# Altium PCB triumvi_v10_config.PcbDoc
Units mil, origin at the board's own origin, x right, y up, seen from the top; angles counter-clockwise.
Board outline 1100 x 1020 mil, 4 copper layers (Top Layer, GND, VCC, Bottom Layer), stack 30.634 mil thick; 18 components, 30 nets, 118 pads, 71 vias.
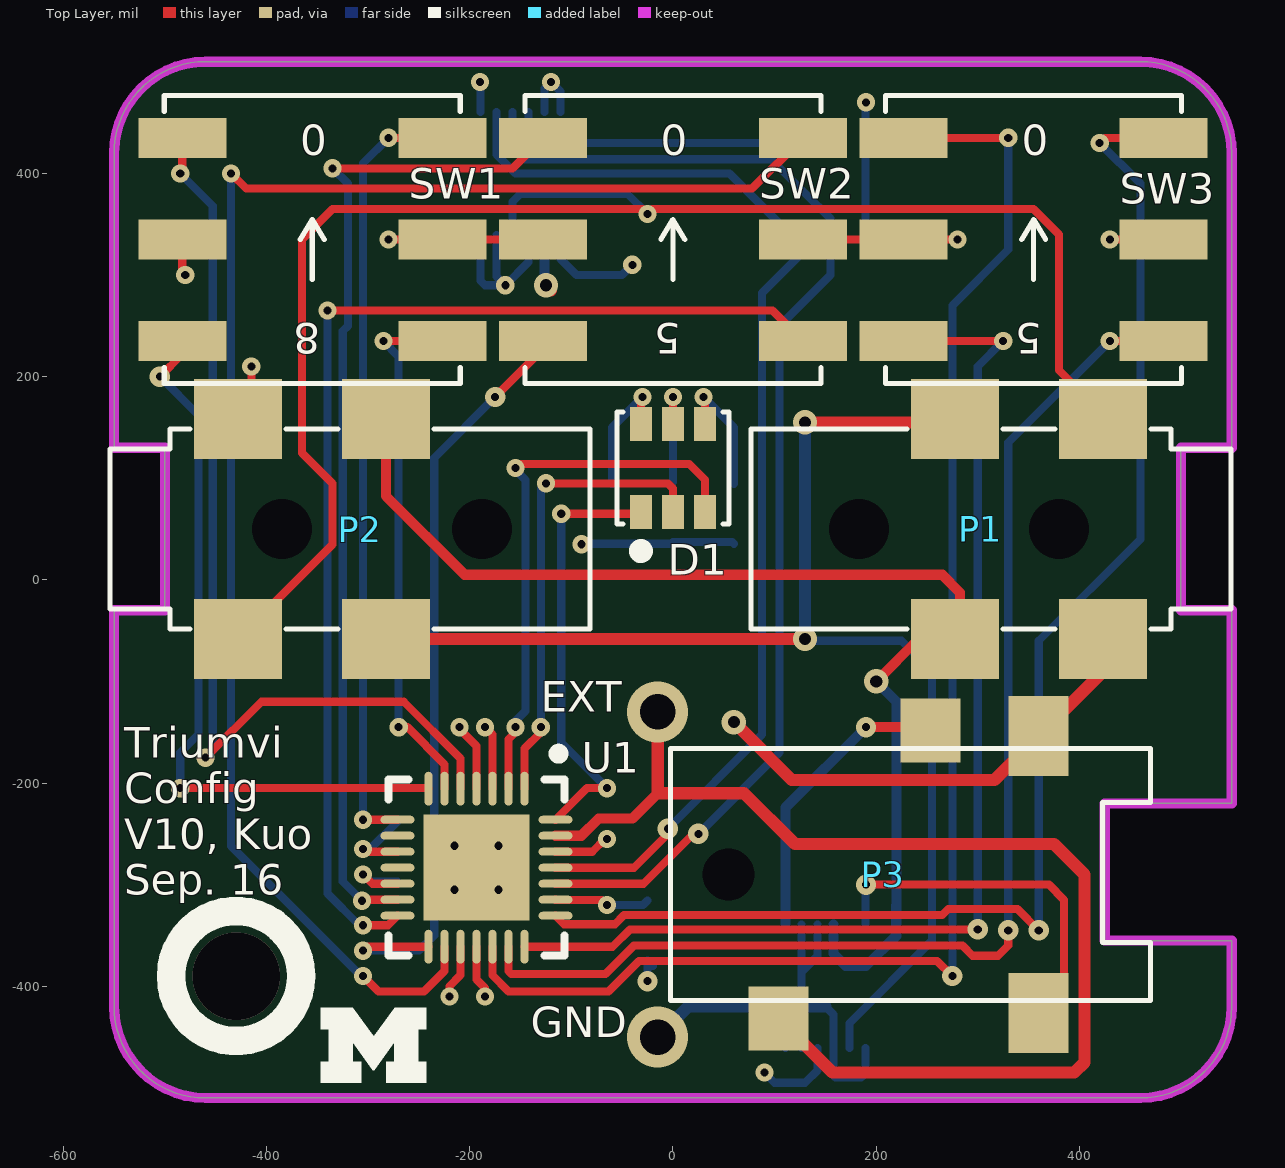
[diagram p0: Top Layer view]
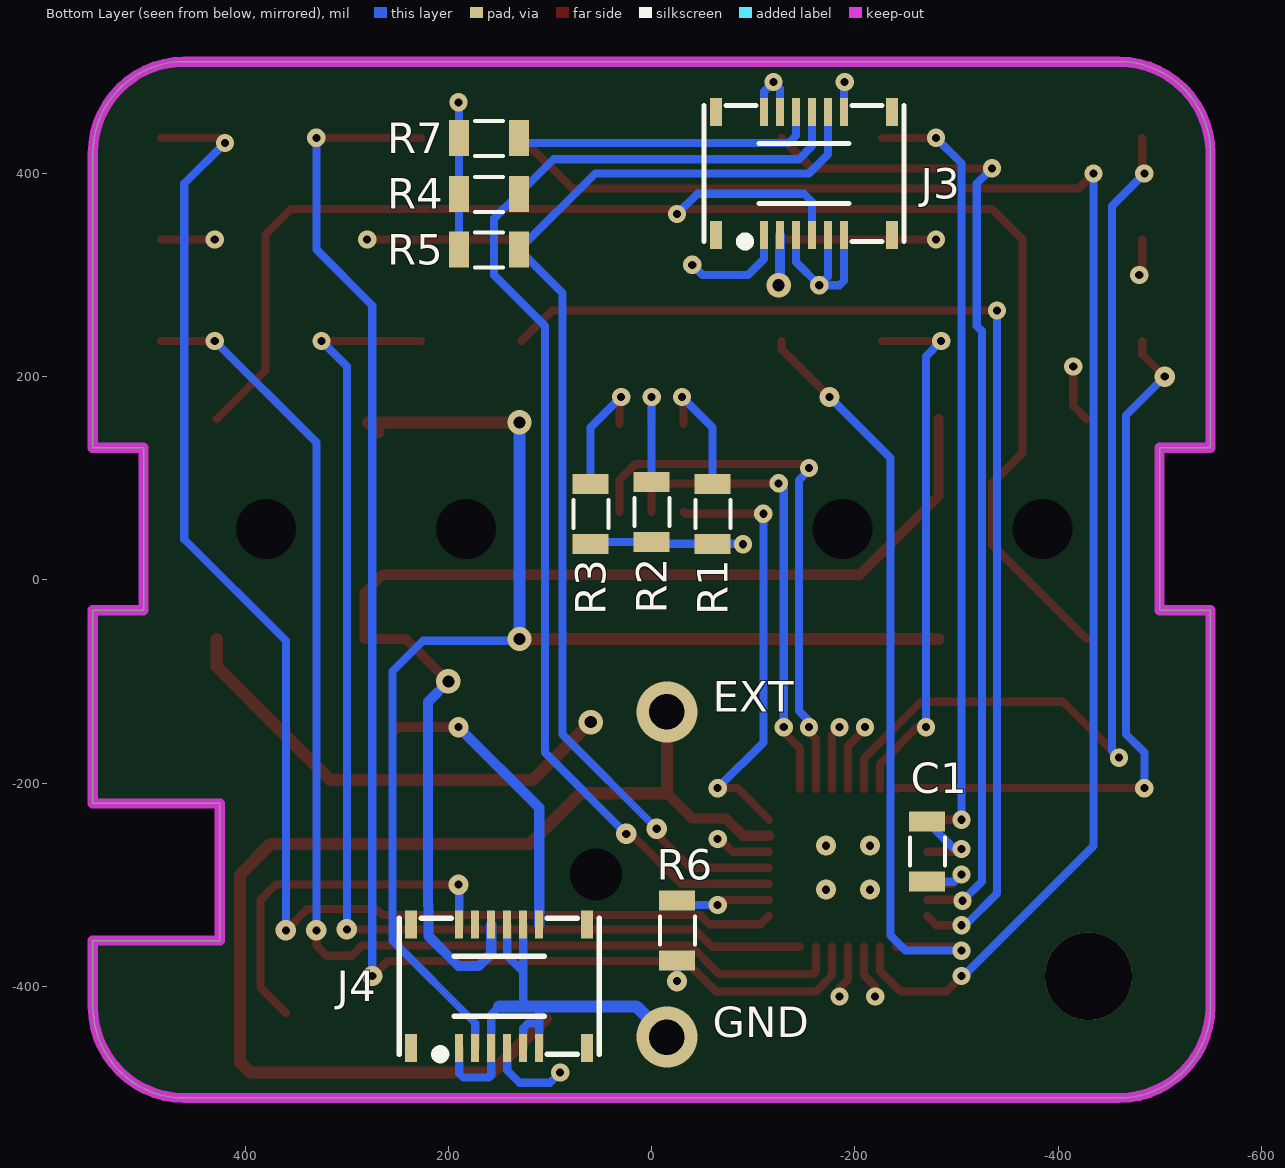
[diagram p1: Bottom Layer view, seen from below]
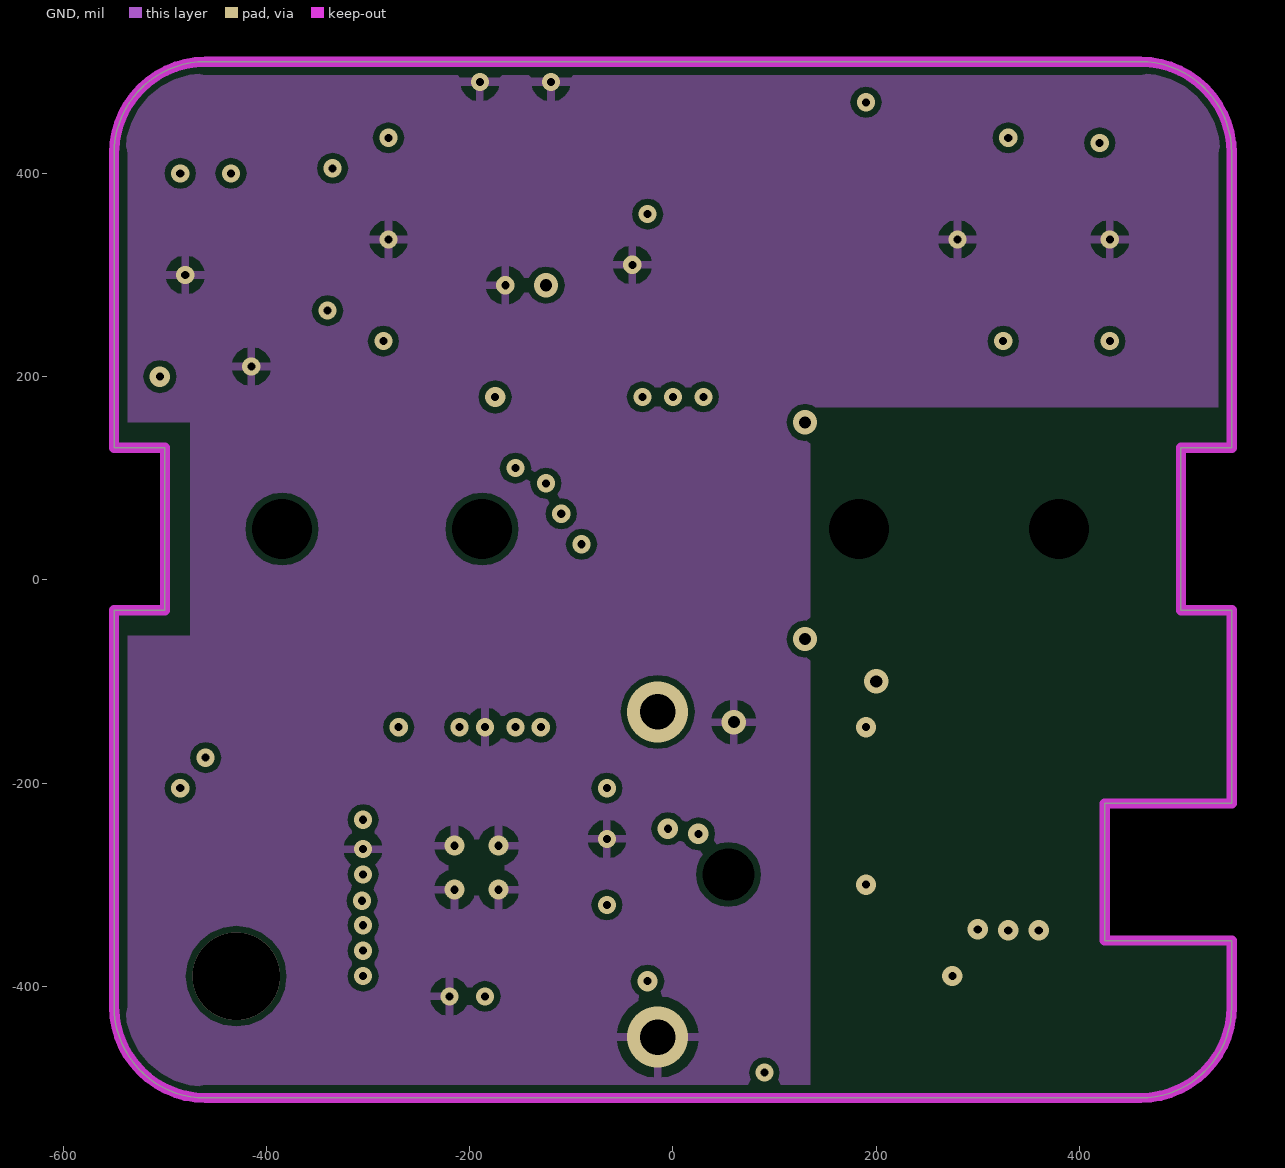
[diagram p2: GND]
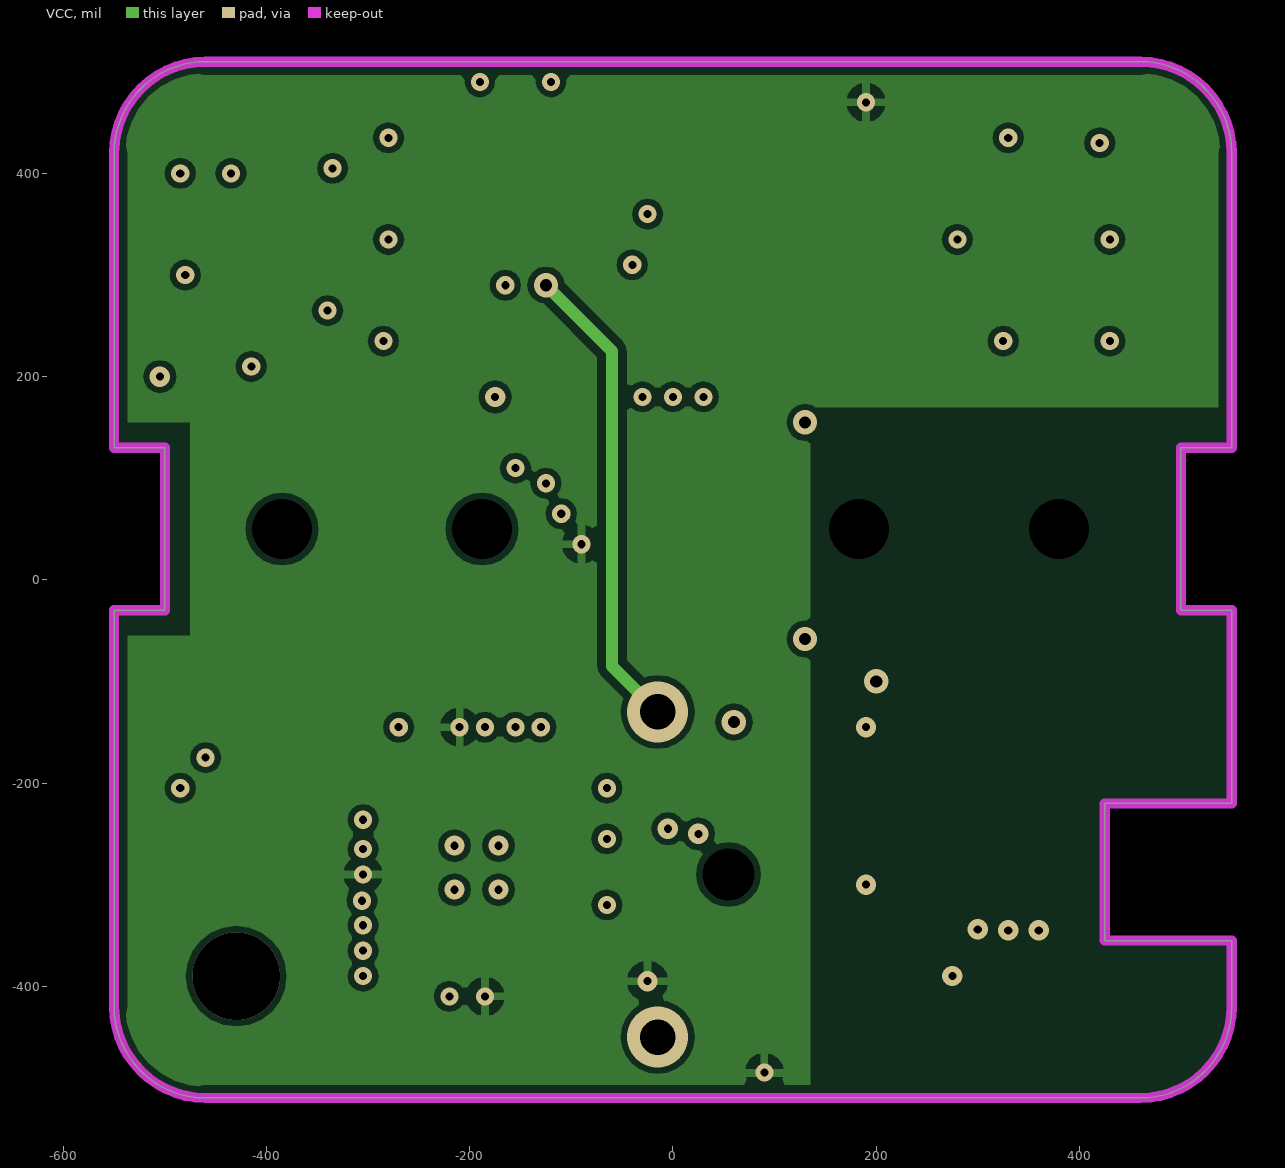
[diagram p3: VCC]
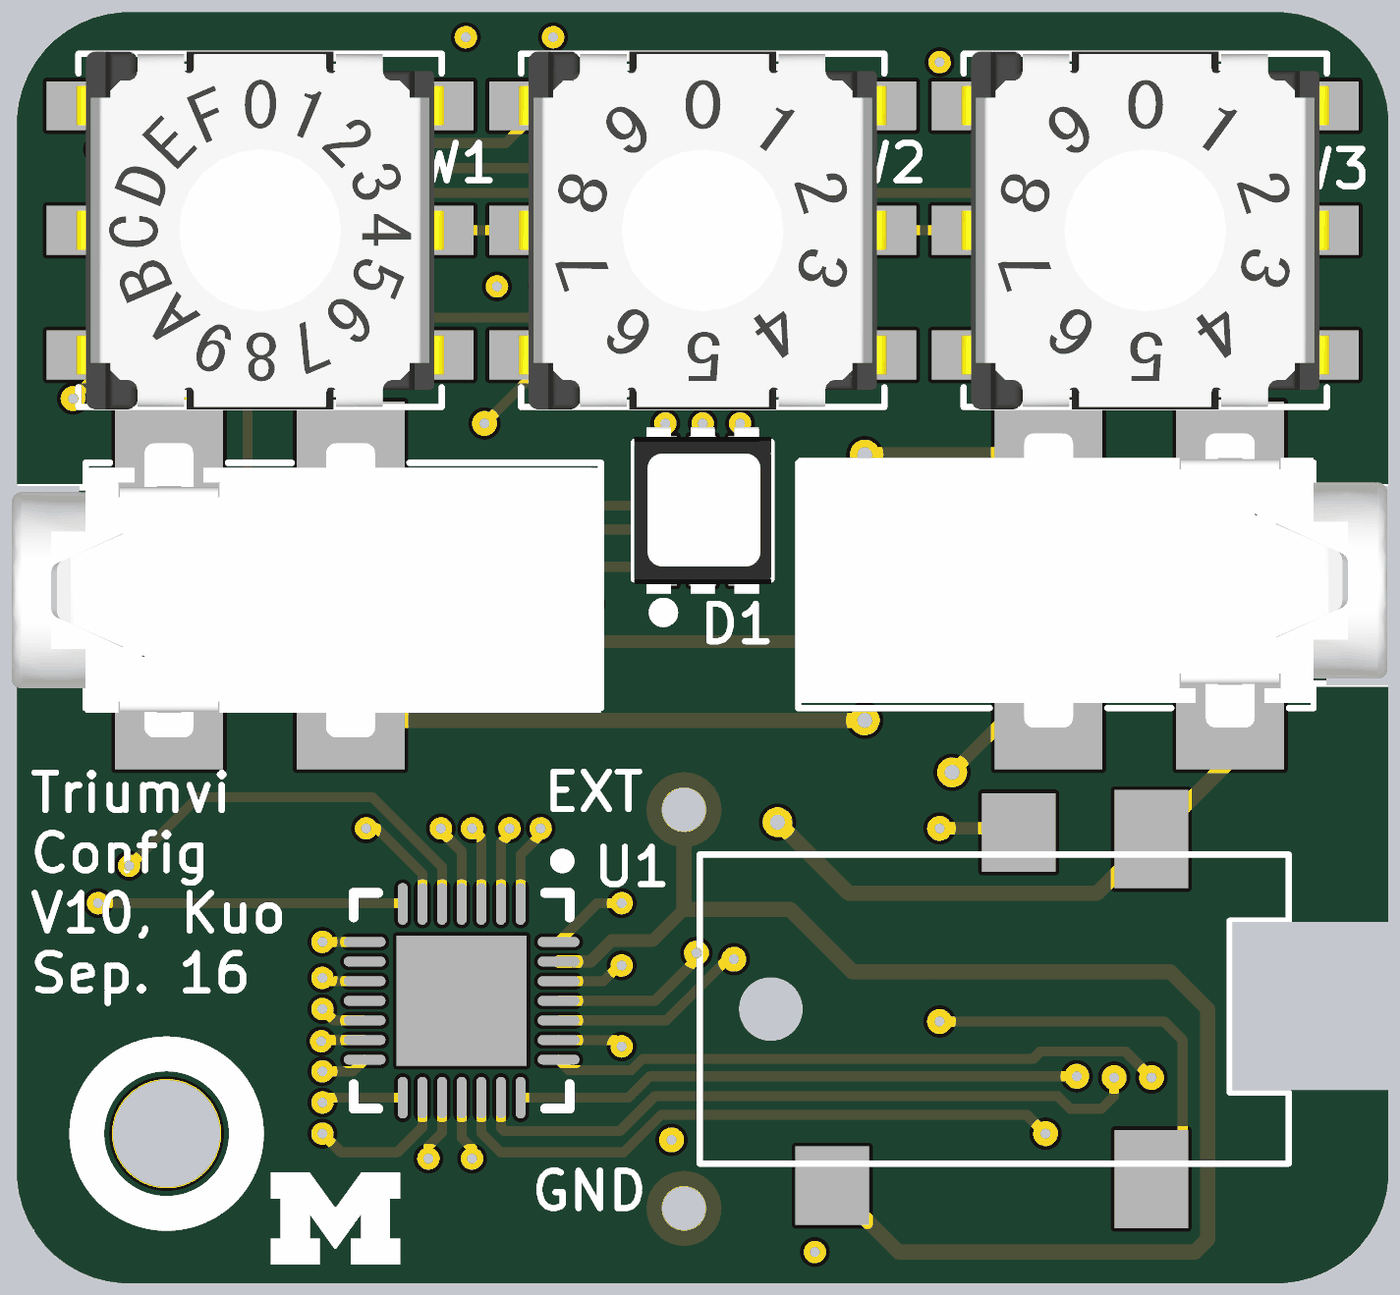
[diagram p4: 3D render of the assembled board from above, using the file's embedded part models]

## Layer stack, top to bottom
Top Solder: solder mask 0.4, Solder Resist, Dk 3.5
Top Layer: signal copper 1.4
Dielectric 1: core 10, FR-4, Dk 4.2
GND: signal copper 1.417
Dielectric 3: prepreg 5, Dk 4.2
VCC: signal copper 1.417
VCC: core 10, Dk 4.2
Bottom Layer: signal copper 1.4
Bottom Solder: solder mask 0.4, Solder Resist, Dk 3.5

## Board outline
-550,-30 -500,-30 -500,130 -550,130 -550,420 cw(c-460,420) -460,510 460,510 cw(c460,420) 550,420 550,130 500,130 500,-30 550,-30 550,-220 425,-220 425,-355 550,-355 550,-420 cw(c460,-420) 460,-510 -460,-510 cw(c-460,-420) -550,-420

## Design rules (kind name [scope] priority, off if disabled: settings)
Clearance "non plated holes" [InPadClass('NPHOLES')] p1: gap=10 // Sunstone Circuits Minimum Clearance Rule (MLB~4&6 Layer Designs)
Clearance "Clearance~Sunstone Circuits" [All] p2: gap=6 except(8: Track-Poly Poly-Poly) // Sunstone Circuits Minimum Clearance Rule (MLB~4&6 Layer Designs)
DiffPairsRouting [All] p1: maxlimit=10 minlimit=10 mostfreqgap=10 toplayer_minwidth=6 toplayer_maxwidth=15 toplayer_prefwidth=15 midlayer1_minwidth=6 midlayer1_maxwidth=15 midlayer1_prefwidth=15 midlayer2_minwidth=6 midlayer2_maxwidth=15 midlayer2_prefwidth=15 bottomlayer_minwidth=6 bottomlayer_maxwidth=15 bottomlayer_prefwidth=15 maxuncoupledlength=500
HoleSize "HoleSize~Sunstone Circuits" [All] p1: absolutevalues=TRUE maxlimit=251 minlimit=8 maxpercent=80.000 minpercent=20.000 // Sunstone Circuits Hole Size Rule (MLB~4&6 Layer Designs)
HoleSize Testpoint [All] p2: absolutevalues=TRUE maxlimit=100 minlimit=1 maxpercent=80.000 minpercent=20.000
HoleSize TestPointUsage [All] p3: absolutevalues=TRUE maxlimit=100 minlimit=1 maxpercent=80.000 minpercent=20.000
MinimumAnnularRing "MinimumAnnularRing~Sunstone Circuits" [All] p1 off: minimumring=7 // Sunstone Circuits Minimum Annular Ring (MLB~4&6 Layer Designs)
MinimumSolderMaskSliver [All] p1 off: minsoldermaskwidth=10
PlaneClearance "PlaneClearance~Sunstone Circuits" [All] p1: clearance=12 // Sunstone Circuits Power Plane Clearance Rule (MLB~4&6 Layer Designs)
PlaneConnect "PlaneConnect~Sunstone Circuits" [All] p1: planeconnectstyle=Relief reliefexpansion=10 reliefentries=4 reliefconductorwidth=8 reliefairgap=10 // Sunstone Circuits Power Plane Connect Rule (MLB~4&6 Layer Designs)
PolygonConnect "PolygonConnect~Sunstone Circuits" [All] p1: connectstyle=Relief reliefconductorwidth=8 reliefentries=4 polygonreliefangle="90 Angle" airgapwidth=10 // Sunstone Circuits Polygon Connect Style (MLB~4&6 Layer Designs)
RoomDefinition config_battery [InComponentClass('config_battery')] p1 off: confinementstyle=ConfineIn formatcopy=TRUE lockcomponents=FALSE outline -539.26,175.77 -539.26,484.23 -260.93,484.23 -260.93,487.41 -39.07,487.41 -39.07,484.23 539.26,484.23 539.26,20.52 544.22,20.52 544.22,-524.67 45.78,-524.67 45.78,-516.59 -450.91,-516.59 -450.91,23.74 -494.61,23.74 -494.61,175.77
RoutingVias "RoutingVias~Sunstone Circuits" [All] p1: holewidth=16 width=30 viastyle="Through Hole" minholewidth=6 minwidth=18 maxholewidth=20 maxwidth=40 // Sunstone Circuits Routing Vias Rule (MLB~4&6 Layer Designs)
ShortCircuit "ShortCircuit~Sunstone Circuits" [All] p1: allowed=FALSE // Sunstone Circuits Short Circuit Rule~Do Not Allow (MLB~4&6 Layer Designs)
SilkToSilkClearance [All] p1 off: silktosilkclearance=10
SilkToSolderMaskClearance [IsPad] p1 off: minsilkscreentomaskgap=10 clearancetoexposedcopper=TRUE
SolderMaskExpansion TentVias [isVia] p1: expansion=-20 // Sunstone Circuits Solder Mask Expansion Rule (MLB~4&6 Layer Designs)
SolderMaskExpansion "SolderMaskExpansion~Sunstone Circuits" [All] p2: expansion=3 // Sunstone Circuits Solder Mask Expansion Rule (MLB~4&6 Layer Designs)
ViasUnderSMD "ViasUnderSMD~Sunstone Circuits" [All] p1: allowed=FALSE // Sunstone Circuits Vias Under SMD~Do Not Allow (MLB~4&6 Layer Designs)
Width "Width~Sunstone Circuits" [All] p1: maxlimit=100 minlimit=6 preferedwidth=10 // Sunstone Circuits Minimum Width Rule (MLB~4&6 Layer Designs)
22 further rules are at their usual default settings.

## Components (designator, comment, footprint, x,y, rotation, side; value= is the part's Value field where it differs from the comment)
C1 "Ceramic capacitor" 0603 -271.1,-267.6 r90 bottom
D1 "CLY6D-FKC" PLCC6 0,110 r90 top
J3 "DF40B(2.0)-12DS-0.4V" DF40B(2.0)-12DS-0.4V -150,400 r180 bottom locked
J4 "DF40B(2.0)-12DS-0.4V" DF40B(2.0)-12DS-0.4V 150,-400 r180 bottom locked
P1 "PJ2505S-041" PJ2505S-041 490,50 r180 top
P2 "PJ2505S-041" PJ2505S-041 -495,50 r0 top
P3 "PJ3516S-041" PJ3516S-041 470,-290 r180 top
R1 "Chip resistor" 0603 -60,65 r90 bottom
R2 "Chip resistor" 0603 0,66.69 r90 bottom
R3 "Chip resistor" 0603 60,65 r90 bottom
R4 "Chip resistor" 0603 160,380 r180 bottom
R5 "Chip resistor" 0603 160,325 r180 bottom
R6 "Chip resistor" 0603 -25,-345 r90 bottom
R7 "Chip resistor" 0603 160,435 r180 bottom
SW1 "SH-7050TA" SH-7050A -355,335 r0 top
SW2 "SH-7010TA" SH-7010A 0,335 r0 top
SW3 "SH-7010TA" SH-7010A 355,335 r0 top
U1 "SX1509B" QFN40P400X400X60_HS-29N -193.35,-283.35 r270 top

## Footprints (in the part's own frame and the unit in brackets; to place one, negate y for a bottom-side part, rotate by r counter-clockwise, add the part's x,y. Pads: shape width x height; smd on the part's side, far side on the other; paste and mask are expansions set on the pad)
0603 [mm] "2-Leads, Body 1.55x0.85mm, IPC Medium Density"
  rect 0.5x0.9 smd: 1(-0.75,0) 2(0.75,0)
  silkscreen extent -0.35,-0.45 0.35,0.43, body extent -0.75,-0.42 0.75,0.43, height 0.5
DF40B(2.0)-12DS-0.4V [mm] "Hirose DF40 Series, 0.4 mm pitch, 2.0 mm stack height, 12 positions"
  rect 0.2x0.7 smd: 1(-1,-1.54) 2(-0.6,-1.54) 3(-0.2,-1.54) 4(0.2,-1.54) 5(0.6,-1.54) 6(1,-1.54) 7(1,1.54) 8(0.6,1.54) 9(0.2,1.54) 10(-0.2,1.54) 11(-0.6,1.54) 12(-1,1.54)
  rect 0.3x0.7 smd: ""(-2.2,-1.54) ""(-2.2,1.54) ""(2.2,-1.54) ""(2.2,1.54)
  silkscreen extent -2.5,-1.8 2.5,1.7, body extent -2.5,-1.69 2.5,1.69, height 1.9
PJ2505S-041 [mm] "2.5 mm phone jack, 4 terminals"
  rect 2.2x2 smd: 1(1.7,2.75) 2(1.7,-2.75) 3(5.4,2.75) 4(5.4,-2.75)
  round 0 hole 1.5 unplated: ""(2.8,0) ""(7.8,0)
  silkscreen extent -1.5,-2.5 10.5,2.5, body extent -1.5,-3.1 10.5,2.9, height 3.7
PJ3516S-041 [mm] "Switchtech Enterprise LTD. 3.5mm phone jack"
  rect 1.5x2 smd: 1(2.8,-3.465) 2(2.8,3.465)
  rect 1.5x1.6 smd: 3(5.5,-3.6) 4(9.3,3.6)
  rect 0x0 hole 1.3 unplated: ""(10.55,0)
  silkscreen extent 0,-3.15 12,3.15, body extent -2,-3.15 12,3.15, height 4.5
PLCC6 [mm] "CREE PLCC6 LED"
  rect 0.85x0.55 smd: 1(-1.1,0.8) 2(-1.1,0) 3(-1.1,-0.8) 4(1.1,-0.8) 5(1.1,0) 6(1.1,0.8)
  silkscreen extent -2.22,-1.4 1.4,1.4, body extent -1.7,-1.4 1.7,1.4, height 1.85
QFN40P400X400X60_HS-29N [mm] "QFN, 28-Leads, Body 4.00x4.00mm, Pitch 0.40mm, Thermal Pad 2.65x2.65mm, IPC Medium Density"
  oval 0.85x0.2 smd: 1(-1.975,1.2) 2(-1.975,0.8) 3(-1.975,0.4) 4(-1.975,0) 5(-1.975,-0.4) 6(-1.975,-0.8) 7(-1.975,-1.2) 15(1.975,-1.2) 16(1.975,-0.8) 17(1.975,-0.4) 18(1.975,0) 19(1.975,0.4) 20(1.975,0.8) 21(1.975,1.2)
  oval 0.2x0.85 smd: 8(-1.2,-1.975) 9(-0.8,-1.975) 10(-0.4,-1.975) 11(0,-1.975) 12(0.4,-1.975) 13(0.8,-1.975) 14(1.2,-1.975) 22(1.2,1.975) 23(0.8,1.975) 24(0.4,1.975) 25(0,1.975) 26(-0.4,1.975) 27(-0.8,1.975) 28(-1.2,1.975)
  rect 2.65x2.65 smd: 29(0,0)
  silkscreen extent -2.97,-2.2 2.2,2.2, body extent -2.05,-2.05 2.05,2.05, height 0.6
SH-7010A [mm] "Rotary Coded Switch, SH-7000 series, 10 positions, real code, J hook"
  rect 2.2x1 smd: 1(-3.25,2.54) 2(3.25,-2.54) 4(-3.25,-2.54) 8(3.25,2.54) C(-3.25,0) C(3.25,0)
  silkscreen extent -3.7,-3.6 3.7,3.6, body extent -3.75,-3.65 3.75,3.65, height 3.77
SH-7050A [mm] "Rotary Coded Switch, SH-7000 series, 16 positions, real code, J hook"
  rect 2.2x1 smd: 1(-3.25,2.54) 2(3.25,-2.54) 4(-3.25,-2.54) 8(3.25,2.54) C(-3.25,0) C(3.25,0)
  silkscreen extent -3.7,-3.6 3.7,3.6, body extent -3.75,-3.65 3.75,3.65, height 3.77

## Part data
C1: library part C_0.1u_25V_0603_ceramic, "Ceramic capacitor, 0.1 uF, 0603 package"
D1: library part D_CLY6D-FKC, "CREE PLCC6 3 in 1 SMD LED"
J3 J4: "Hirose BM20 Series, 0.4mm pitch, 2mm stack height, 12 pos, header"
P1 P2: "2.5 mm phone jack, 4 terminals"
P3: "3.5 mm phone jack, 4 terminals"
R1: library part R_150_0603, "Chip resistor, 150,  0603 package"
R2: library part R_220_0603, "Chip resistor, 220, 0603 package"
R3: library part R_330_0603, "Chip resistor, 330, 0603 package"
R4 R5: library part R_20K_0603, "Chip resistor, 20K, 0603 package"
R6 R7: library part R_100K_0603, "Chip resistor, 100K, 0603 package"
SW1 SW2 SW3: "ROTARY CODED SWITCHES"
U1: "Voltage Level Shifting GPIO  with LED Driver and Keypad Engine"

## Via types
v1: diameter 18, hole 8, Top Layer to Bottom Layer, 48 vias
v2: diameter 20, hole 8, Top Layer to Bottom Layer, 11 vias
v3: diameter 24, hole 12, Top Layer to Bottom Layer, 5 vias
v4: diameter 19.68, hole 8, Top Layer to Bottom Layer, 4 vias
v5: diameter 60, hole 35, Top Layer to Bottom Layer, 2 vias
v6: diameter 86, hole 86, Top Layer to Bottom Layer, 1 vias

## Nets (pads, with @x,y where several pads share a name; then routed paths per layer and width w, separated by ;. In a path a pad name is that pad's centre, name@x,y a point inside that pad or via, vN(x,y) a via of type N, cw(c..) or ccw(c..) an arc to the next point about the centre after c; other vN are vias at no path point)
BATT_PACK_PWR: C1.1 J4.4 R1.1 R2.1 R3.1 R4.1 R5.1 R6.1 R7.1 U1.4 U1.12 U1.18 | length 603.6
  Top Layer w8: v1@-305.47,-289.53 v1(-305,-290) -295.91,-299.09 U1.12 ; v1(-210,-145) -210,-146.87 -193.35,-163.52 U1.4 ; U1.18 -193.35,-393.22 -185,-401.57 v1(-185,-410)
  Bottom Layer w8: v1(-305,-290) -297.87,-297.13 C1.1 ; v1(-90,35) -89.53,35.47 R1.1 -1.69,35.47 R2.1 58.31,37.17 R3.1 ; v2(-25,-395) R6.1 R6.1@-19.53,-380 ; v1(90,-485) 100,-495 130,-495 142.13,-482.87 J4.4 ; R5.1 R4.1 R7.1 189.53,469.53 v1(190,470)
EXT_VOLT_SEL: J4.12 P3.2 | length 362.7
  Top Layer w8: v2(190,-300) 370,-300 385,-315 385,-401.18 P3.2
  Bottom Layer w8: J4.12 189.37,-300.63 v2(190,-300)
EXT_VOLT_WAVE: J4.7 P3.3 | length 292.1
  Top Layer w10: v2(190,-145) 250.2,-145 P3.3
  Bottom Layer w10: J4.7 110.63,-224.37 v2(190,-145)
GND: C1.2 J3.1 J3.3 J3.5 J3.6 J3.7 J3.11 J3.12 J4.1 J4.3 J4.5 J4.6 J4.8 J4.9 P1.1 P2.1 P3.1 SW1.C SW2.C SW3.C U1.3 U1.10 U1.17 U1.26 U1.29 | length 2077.4
  Top Layer w8: SW1.C@-482.95,335 -482.95,302.95 v1(-480,300) ; P2.1 -415,171.34 v1(-415,210) ; v1(-305,-265) -302.4,-267.6 U1.10 ; v1(-280,335) -227.05,335 SW2.C@-127.95,335 ; v1(-220,-410) -220,-400 -209.09,-389.09 U1.17 ; v1(-185,-145) -177.6,-152.4 U1.3 ; U1.26 -79.47,-267.6 -66.87,-255 v1(-65,-255) ; SW2.C@127.95,335 227.05,335 v1(280,335) ; v1(430,335) SW3.C@482.95,335
  Top Layer w12: v3(60,-140) 117,-197 316.35,-197 P3.1 428.07,-85.28 P1.1@428.07,-58.27
  Bottom Layer w8: v1(-305,-265) -298.03,-265 C1.2 ; v1(-190,490) -189.37,489.37 J3.7 ; J3.6 -189.37,294.37 -185,290 v1(-165,290) ; J3.5 -173.62,298.62 v1(-165,290) ; J3.3 -142.13,312.87 v1(-165,290) ; J3.11 -126.38,483.62 v1(-120,490) -110.63,480.63 J3.12 ; J3.1 -110.63,315.63 -95,300 -50,300 v1(-40,310) v1@-40,305 ; 105,-420 110.63,-425.63 110.63,-436.85 ; J4.6 110.63,-436.85 ; J4.5 126.38,-441.38 121.85,-436.85 110.63,-436.85 ; 126.38,-420 126.38,-385.85 ; J4.8 126.38,-385.85 ; J4.9 142.13,-370.1 126.38,-385.85 ; 150,-420 157.87,-427.87 J4.3 157.87,-487.87 160,-490 185,-490 189.37,-485.63 J4.1
  Bottom Layer w12: v5(-15,-450) 15,-420 105,-420 126.38,-420 150,-420
  other v4: -215,-305 -171.69,-305 -215,-261.69 -171.69,-261.69
I2C_SCL: J3.8 R5.2 U1.25 | length 1147.5
  Top Layer w8: U1.25 -38.35,-283.35 0,-245 v2(-5,-245)
  Bottom Layer w8: J3.8 -173.62,418.62 -155,400 55.47,400 R5.2 87.72,282.24 87.72,-152.28 v2(-5,-245)
I2C_SDA: J3.9 R4.2 U1.24 | length 1196.5
  Top Layer w8: U1.24 -29.09,-299.09 20,-250 v2(25,-250)
  Bottom Layer w8: J3.9 -157.87,426.87 -145,414 96.47,414 R4.2 155,355.47 155,300 105,250 105,-170 v2(25,-250)
NetD1_1: D1.1 U1.28 | length 431.3
  Top Layer w8: U1.28 -84.49,-205 v1(-65,-205) ; v1(-110,65) -33.19,65 D1.1
  Bottom Layer w8: v1(-110,65) -110,-160 v1(-65,-205)
NetD1_2: D1.2 U1.1 | length 459.7
  Top Layer w8: U1.1 -146.1,-166.1 -130,-150 v1(-130,-145) ; v1(-125,95) -5,95 0,90 D1.2
  Bottom Layer w8: v1(-130,-145) -130,90 v1(-125,95)
NetD1_3: D1.3 U1.2 | length 553.1
  Top Layer w8: U1.2 -161.85,-156.85 -155,-150 v1(-155,-145) ; v1(-155,110) -151,114 16,114 31.5,98.5 D1.3
  Bottom Layer w8: v1(-155,-145) -155,-139.13 -145,-129.13 -145,98.13 -155,108.13 v1(-155,110)
NetD1_4: D1.4 R3.2 | length 125.2
  Top Layer w8: v1(30,180) 31.5,178.5 D1.4
  Bottom Layer w8: v1(30,180) 60,150 R3.2
NetD1_5: D1.5 R2.2 | length 110.5
  Top Layer w8: D1.5 v1(0,180)
  Bottom Layer w8: R2.2 v1(0,180)
NetD1_6: D1.6 R1.2 | length 125.2
  Top Layer w8: D1.6 -31.5,178.5 v1(-30,180)
  Bottom Layer w8: R1.2 -60,150 v1(-30,180)
NetJ3_10: J3.10 R7.2 | length 301.1
  Bottom Layer w8: J3.10 -142.13,437.13 -135,430 125.47,430 R7.2
NetR6_2: R6.2 U1.23 | length 94.6
  Top Layer w8: U1.23 -115.43,-315 -70,-315 v1(-65,-320)
  Bottom Layer w8: v1(-65,-320) -29.53,-320 R6.2
NetSW1_1: SW1.1 U1.5 | length 953.5
  Top Layer w8: v1(-485,400) -482.95,402.05 SW1.1 ; v1(-460,-175) -405,-120 -265,-120 -209.09,-175.91 U1.5
  Bottom Layer w8: v1(-485,400) -453,368 -453,-168 v1(-460,-175)
NetSW1_2: SW1.2 U1.6 | length 528.5
  Top Layer w8: v1(-285,235) SW1.2 ; v1(-270,-145) -261.41,-145 -224.84,-181.57 U1.6
  Bottom Layer w8: v1(-285,235) -270,220 v1(-270,-145)
NetSW1_4: SW1.4 U1.7 | length 717
  Top Layer w8: v2(-505,200) -482.95,222.05 SW1.4 ; v1(-485,-205) -241.18,-205 U1.7
  Bottom Layer w8: v2(-505,200) -467,162 -467,-152 -485,-170 v1(-485,-205)
NetSW1_8: SW1.8 U1.8 | length 768.3
  Top Layer w8: v1(-305,-236.1) U1.8 ; v1(-280,435) SW1.8
  Bottom Layer w8: v1(-305,-236.1) -305,410 v1(-280,435)
NetSW2_1: SW2.1 U1.13 | length 991.8
  Top Layer w8: v1(-335,405) -157.95,405 SW2.1 ; v1(-306.01,-315.86) -305,-314.84 U1.13
  Bottom Layer w8: v1(-335,405) -320,390 -320,250 -325,245 -325,-296.87 v1(-306.01,-315.86)
NetSW2_2: SW2.2 U1.14 | length 1139.9
  Top Layer w8: v1(-340,265) 97.95,265 SW2.2 ; v1(-305,-340) -280.51,-340 U1.14
  Bottom Layer w8: v1(-340,265) -340,-308.74 -308.74,-340 v1(-305,-340)
NetSW2_4: SW2.4 U1.15 | length 776.6
  Top Layer w8: v1(-305,-365) -301.1,-361.1 U1.15 ; v2(-175,180) -127.95,227.05 SW2.4
  Bottom Layer w8: v1@-310,-365 v1(-305,-365) -250,-365 -235,-350 -235,120 v2(-175,180)
NetSW2_8: SW2.8 U1.16 | length 1553.3
  Top Layer w8: v1(-435,400) -420,385 77.95,385 SW2.8 ; v1(-305,-390) -290,-405 -245,-405 -224.84,-384.84 U1.16
  Bottom Layer w8: v1(-435,400) -435,-261.87 -306.87,-390 v1(-305,-390)
NetSW3_1: SW3.1 U1.19 | length 1456.6
  Top Layer w8: U1.19 -177.6,-389.17 -161.77,-405 -63.28,-405 -33.28,-375 260,-375 v2(275,-390) ; SW3.1 v1(330,435)
  Bottom Layer w8: v2(275,-390) 275,270 330,325 v1(330,435)
NetSW3_2: SW3.2 U1.20 | length 1226.2
  Top Layer w8: U1.20 -161.85,-385.12 -159.14,-387.83 -66.37,-387.83 -38.53,-360 285,-360 295,-370 320,-370 330,-360 v2(330,-345) ; v1(430,235) SW3.2
  Bottom Layer w8: v2(330,-345) 330,135 v1(430,235)
NetSW3_4: SW3.4 U1.21 | length 1140.5
  Top Layer w8: U1.21 -59.43,-361.1 -42.33,-344 v2(300,-344) ; SW3.4 v1(325,235)
  Bottom Layer w8: v2(300,-344) 300,210 v1(325,235)
NetSW3_8: SW3.8 U1.22 | length 1392
  Top Layer w8: U1.22 -107.18,-339 -57.13,-339 -48.13,-330 265,-330 271,-324 339,-324 v2(360,-345) ; v1(420,430) 425,435 SW3.8
  Bottom Layer w8: v2(360,-345) 360,-60 460,40 460,390 v1(420,430)
R\D\Y\: J3.4 P1.2 P2.2 | length 1595
  Top Layer w8: P2.2 -335,34.8 -335,95 -365,125 -365,335 -335,365 -30,365 v1(-25,360) -20,365 355,365 380,340 380,206.34 P1.2@428.07,158.27
  Bottom Layer w8: J3.4 -157.87,372.13 -150,380 -45,380 v1(-25,360)
V_EXTERNAL: J3.2 P3.4 U1.27 | length 1686
  Top Layer w10: U1.27 -90.13,-251.85 -73.28,-235 -40,-235 -15,-210
  Top Layer w12: v3(-125,290) v3@-120,285 ; v5(-15,-130) -15,-210 70,-210 120,-260 375,-260 405,-290 405,-475 395,-485 157.13,-485 P3.4
  VCC w12: v3(-125,290) -60,225 -60,-85 v5(-15,-130)
  Bottom Layer w10: J3.2 -126.38,291.38 v3(-125,290)
VCAP: J4.10 P1.3 P2.3 | length 1191.9
  Top Layer w10: P2.3 -282.4,82.4 -205,5 265,5 282.4,-12.4 282.4,-58.27 P1.3 241.73,-58.27 v3(200,-100)
  Bottom Layer w10: J4.10 157.87,-367.87 170,-380 190,-380 219.71,-350.29 219.71,-320.74 220,-320.45 220,-120 v3(200,-100)
VCAP_LOOPBACK: J4.2 P1.4 P2.4 | length 1331.4
  Top Layer w12: P2.4 v3(130,-58.27) ; v3(130,155) 279.13,155 P1.4@269.13,145
  Bottom Layer w8: v3(130,-58.27) 131.73,-60 225,-60 255,-90 255,-355 173.62,-436.38 J4.2
  Bottom Layer w12: v3(130,-58.27) v3(130,155)
pads on no net: J3. J4. J4.11 P1. P2. P3. U1.9 U1.11
copper on no net:
  other v6: -430,-390

## Polygon pours and split planes (outlines as drawn)
GND on GND "Top Layer-No Net" (solid, pour order 8): -550,-420 -550,-30 -500,-30 -500,130 -550,130 -550,420 cw(c-460,420) -460,510 460,510 cw(c460,420) 550,420 550,130 500,130 500,-30 550,-30 550,-185 515,-185 515,-395 550,-395 550,-420 cw(c460,-420) 460,-510 -460,-510 cw(c-460,-420)
BATT_PACK_PWR on VCC "Top Layer-No Net" (solid, pour order 6): -550,-420 -550,-30 -500,-30 -500,130 -550,130 -550,420 cw(c-460,420) -460,510 460,510 cw(c460,420) 550,420 550,130 500,130 500,-30 550,-30 550,-185 515,-185 515,-395 550,-395 550,-420 cw(c460,-420) 460,-510 -460,-510 cw(c-460,-420)

## Keep-outs
Keep-Out Layer:
  the board outline again, w10

## Other copper
GND:
  pour cut-out: -580,155 -475,155 -475,-55 -580,-55
  pour cut-out: 135,170 135,-520 559,-520 559,170
VCC:
  pour cut-out: -580,155 -475,155 -475,-55 -580,-55
  pour cut-out: 135,170 135,-520 559,-520 559,170

## Silkscreen, mask and mechanical layers (free items; w line width, h text height)
Top Overlay:
  circle w28: c-430,-390 r64
  region: -346.5,-495.22 -306.96,-495.22 -306.96,-474.1 -315,-474.1 -315,-455 -295.39,-482.48 -294.05,-482.48 -274.11,-455 -274.11,-474.1 -282.16,-474.1 -282.16,-495.22 -242.61,-495.22 -242.61,-474.1 -250.65,-474.1 -250.65,-442.26 -242.61,-442.26 -242.61,-421.15 -273.94,-421.15 -294.05,-448.97 -295.06,-448.97 -315.17,-421.15 -346.5,-421.15 -346.5,-442.26 -338.8,-442.26 -338.8,-474.1 -346.5,-474.1
  text "EXT" at -130,-129.71 h30
  text "Triumvi / Config / V10, Kuo / Sep. 16" at -540,-310 h30
  text "GND" at -140,-450 h30
Bottom Overlay:
  text "EXT" at -60,-130 h30
  text "GND" at -60,-450 h30
Mechanical 14:
  lines w10: -570,-30 -500,-30 -500,130 -570,130 ; -560,-420 ccw(c-460,-420) -460,-520 460,-520 ccw(c460,-420) 560,-420 560,-350 425,-350 425,-215 585,-215 ; -560,420 cw(c-460,420) -460,520 460,520 cw(c460,420) 560,420 ; 570,-30 500,-30 500,130 570,130
Mechanical 16:
  lines w10: -560,-610 -560,610 ; 560,-610 560,610

## Text inside footprints (layer, text, board x,y; h text height)
SW1: Top Overlay "0" at -366.81,417.68 h30; Top Overlay "8" at -347.13,252.32 h30 r180
SW2: Top Overlay "0" at -11.81,417.68 h30; Top Overlay "5" at 7.87,252.32 h30 r180
SW3: Top Overlay "5" at 362.87,252.32 h30 r180; Top Overlay "0" at 343.19,417.68 h30